# Altium PCB SENSEI_Base-Board.PcbDoc (part 5 of 10)
Units mm, origin at the board's own origin, x right, y up, seen from the top; angles counter-clockwise.
Board outline 51.6 x 28.1 mm, 8 copper layers (Top Sig/Pwr, GND1, Sig1, GND2, Sig2, Pwr, GND3, Bot Sig/Pwr), stack 1.53 mm thick; 209 components, 201 nets, 1031 pads, 2222 vias.
Unrouted connection lines stored in the file: 214.
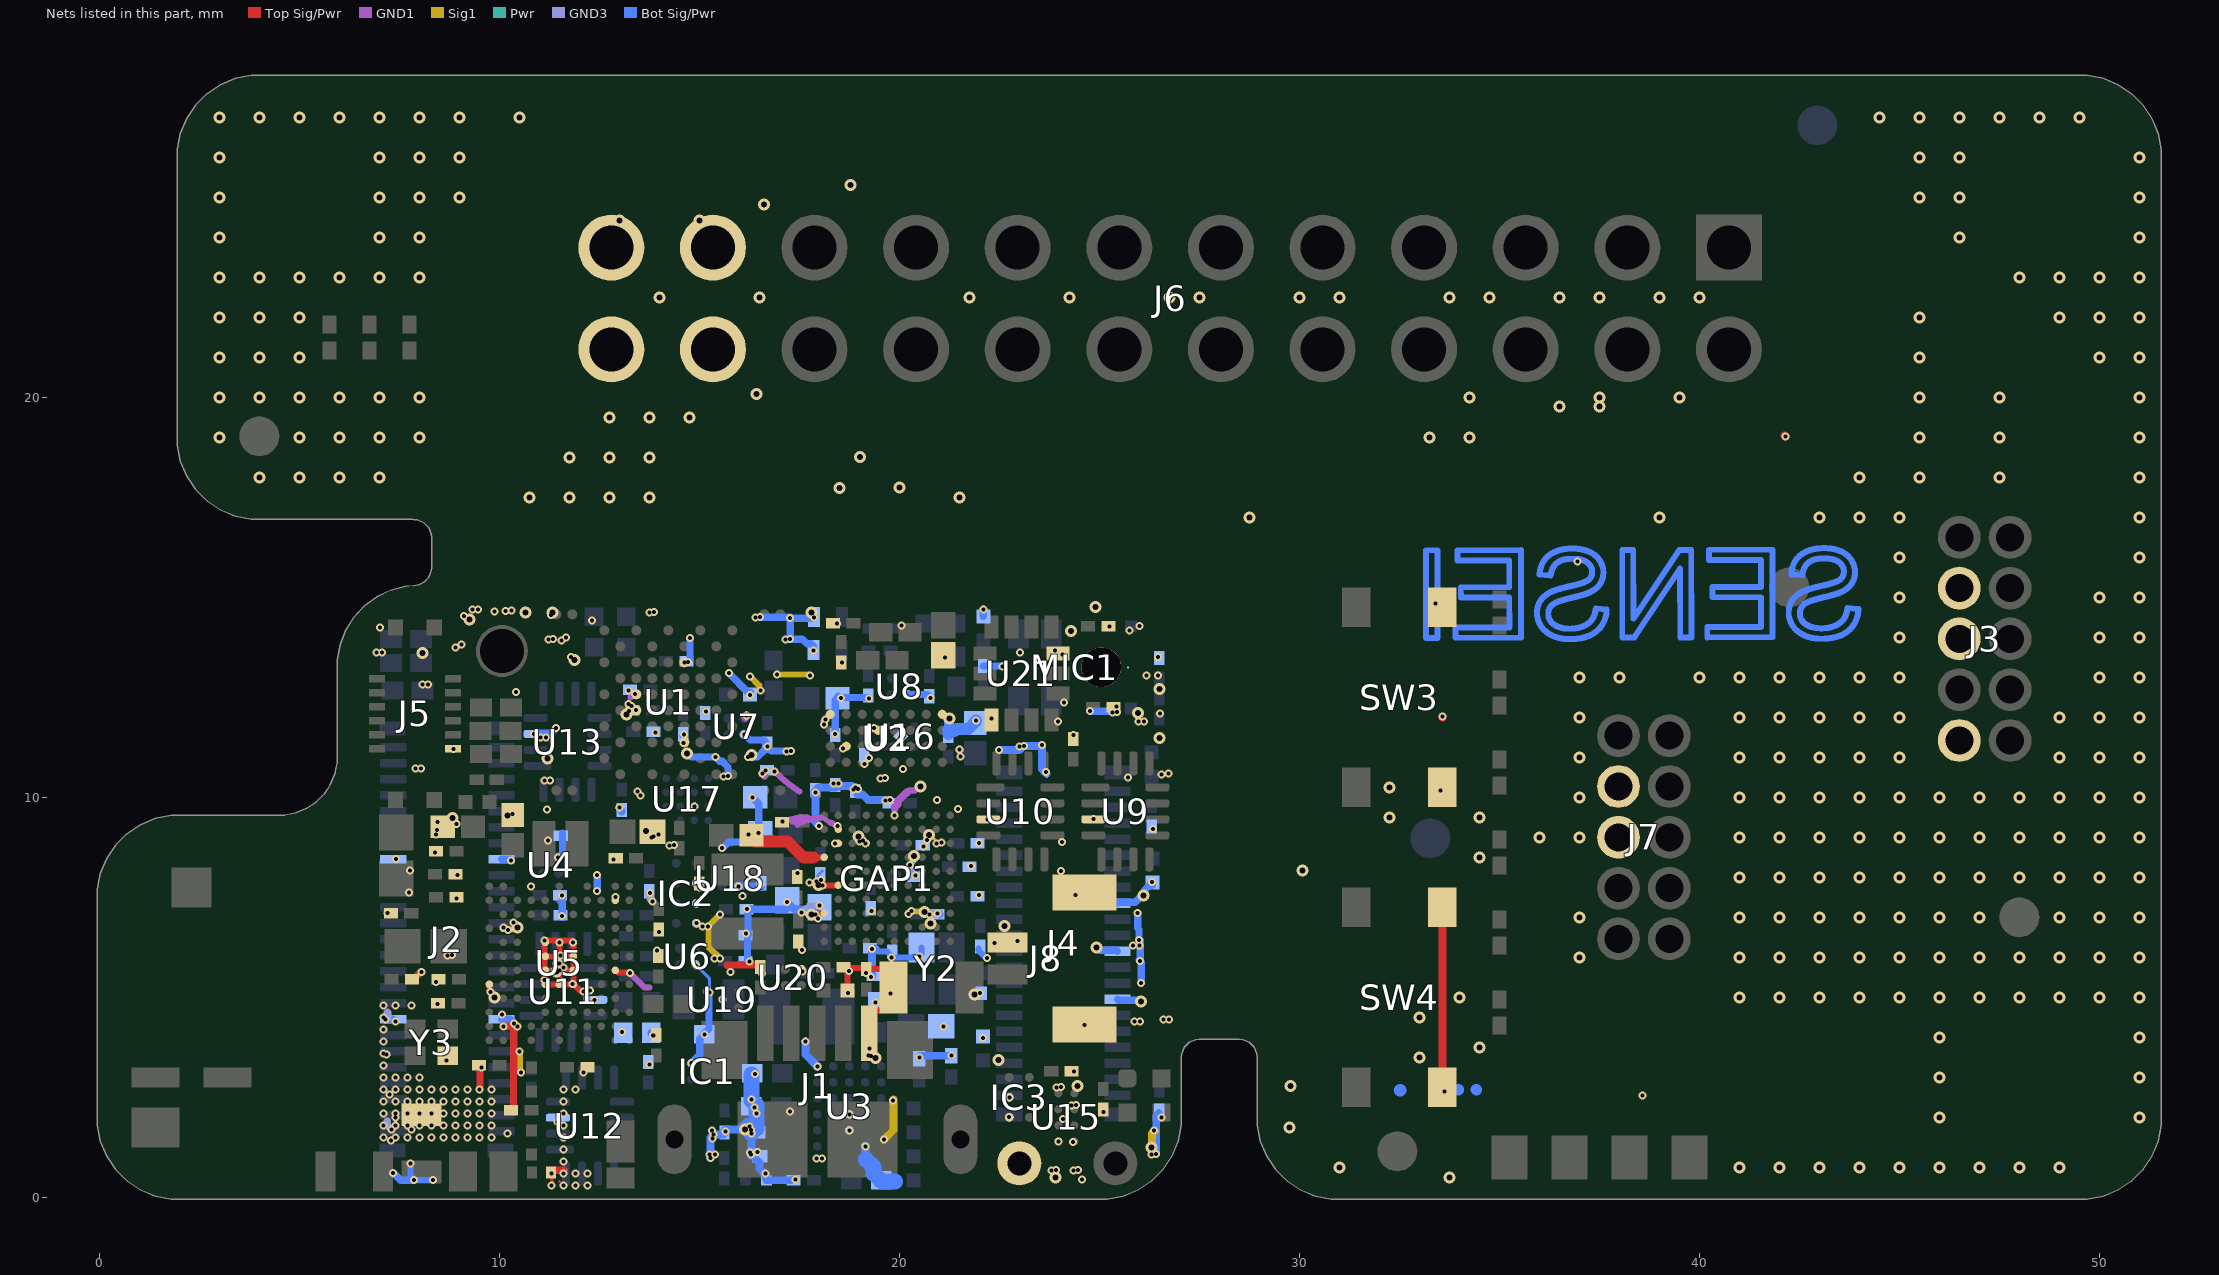
[diagram p10: the nets of this part, all layers, seen from the top]

## Via types
v1: diameter 0.2, hole 0.1, Top Sig/Pwr to GND1, 544 vias
v2: diameter 0.2, hole 0.1, GND3 to Bot Sig/Pwr, 436 vias
v3: diameter 0.2, hole 0.1, GND1 to Sig1, 385 vias
v4: diameter 0.3, hole 0.15, Sig1 to Pwr, 293 vias
v5: diameter 0.3, hole 0.15, Top Sig/Pwr to Bot Sig/Pwr, tented both sides, 284 vias
v6: diameter 0.2, hole 0.1, Pwr to GND3, 280 vias

## Nets (pads, with @x,y where several pads share a name; then routed paths per layer and width w, separated by ;. In a path a pad name is that pad's centre, name@x,y a point inside that pad or via, vN(x,y) a via of type N, cw(c..) or ccw(c..) an arc to the next point about the centre after c; other vN are vias at no path point) (continued)
GND: (continued)
  Bot Sig/Pwr w0.146: 36.285,15.543 36.007,15.563 36.007,15.571 36.008,15.578 36.008,15.585 36.009,15.592 36.009,15.6 36.01,15.607 36.011,15.615 36.012,15.623 36.013,15.631 36.014,15.64 36.015,15.649 36.016,15.658 36.018,15.667 36.02,15.677 36.022,15.688 36.025,15.7 cw(c36.676,15.549) 36.028,15.712 cw(c36.669,15.55) 36.031,15.726 cw(c36.663,15.552) 36.036,15.742 cw(c36.657,15.554) 36.043,15.763 cw(c36.65,15.557) 36.095,15.878 cw(c36.662,15.55) 36.104,15.892 cw(c36.668,15.546) 36.111,15.905 36.114,15.909 cw(c36.606,15.587) 36.124,15.923 cw(c36.601,15.59) 36.138,15.943 cw(c36.598,15.593) 36.199,16.011 cw(c36.605,15.585) 36.212,16.023 cw(c36.609,15.581) 36.223,16.032 cw(c36.613,15.576) 36.232,16.04 cw(c36.617,15.571) 36.241,16.047 36.249,16.054 36.257,16.059 36.264,16.065 36.271,16.07 36.278,16.074 36.284,16.079 36.291,16.083 36.297,16.087 36.303,16.091 36.309,16.094 36.315,16.098 36.321,16.101 36.327,16.104 36.333,16.108 36.338,16.111 36.344,16.113 36.349,16.116 36.355,16.119 36.36,16.122 36.365,16.124 36.371,16.127 36.376,16.129 36.381,16.132 36.387,16.134 36.392,16.137 36.397,16.139 36.4,16.14 36.411,16.145 36.422,16.149 36.432,16.153 36.442,16.157 36.452,16.16 36.461,16.163 36.471,16.166 36.48,16.169 36.488,16.172 36.497,16.175 36.506,16.177 36.514,16.18 36.523,16.182 36.531,16.184 36.539,16.186 36.547,16.188 36.555,16.19 36.563,16.192 36.571,16.193 36.578,16.195 36.586,16.196 36.594,16.198 36.601,16.199 36.609,16.201 36.617,16.202 36.624,16.203 36.631,16.204 36.639,16.206 36.646,16.207 36.654,16.208 36.661,16.209 36.669,16.21 36.676,16.21 36.683,16.211 36.69,16.212 36.697,16.213 36.705,16.213 36.712,16.214 36.719,16.215 36.727,16.215 36.734,16.216 36.741,16.216 36.748,16.217 36.755,16.217 36.762,16.217 36.769,16.218 36.776,16.218 36.783,16.218 36.79,16.219 36.797,16.219 36.805,16.219 36.812,16.219 36.819,16.219 36.826,16.219 36.829,16.219 36.838,16.219 36.846,16.219 36.855,16.219 36.863,16.219 36.871,16.219 36.88,16.218 36.889,16.218 36.897,16.217 36.906,16.217 36.915,16.216 36.924,16.216 36.933,16.215 36.942,16.214 36.951,16.213 36.96,16.212 36.969,16.211 36.979,16.21 36.988,16.209 36.998,16.208 37.008,16.206 37.018,16.205 37.028,16.203 37.039,16.201 37.05,16.199 37.061,16.197 37.072,16.194 37.084,16.192 37.096,16.189 37.109,16.186 37.122,16.182 37.136,16.178 37.151,16.174 cw(c36.875,15.275) 37.166,16.169 cw(c36.878,15.284) 37.184,16.163 cw(c36.881,15.293) 37.203,16.156 cw(c36.884,15.301) 37.226,16.147 37.231,16.145 37.236,16.143 37.241,16.141 37.246,16.139 37.25,16.137 37.255,16.135 37.259,16.133 37.264,16.131 37.269,16.128 37.273,16.126 37.278,16.124 37.283,16.121 37.288,16.119 37.292,16.117 37.297,16.114 37.302,16.111 37.307,16.109 37.312,16.106 37.317,16.103 37.322,16.1 37.327,16.097 37.332,16.094 37.338,16.091 37.343,16.087 37.348,16.084 37.354,16.08 37.359,16.076 37.365,16.072 37.371,16.068 37.377,16.064 37.383,16.059 37.389,16.054 37.396,16.049 37.404,16.043 cw(c37.045,15.617) 37.411,16.036 cw(c37.049,15.621) 37.42,16.029 cw(c37.052,15.626) 37.429,16.02 cw(c37.056,15.63) 37.44,16.009 cw(c37.06,15.633) 37.455,15.993 cw(c37.063,15.636) 37.507,15.927 37.51,15.921 37.513,15.916 37.517,15.91 37.52,15.905 37.524,15.899 37.527,15.893 37.53,15.887 37.534,15.881 37.538,15.874 37.541,15.867 37.545,15.859 37.549,15.851 37.553,15.842 cw(c37.033,15.609) 37.557,15.833 cw(c37.038,15.611) 37.561,15.823 cw(c37.044,15.614) 37.566,15.811 cw(c37.049,15.616) 37.571,15.797 cw(c37.054,15.617) 37.578,15.776 cw(c37.059,15.619) 37.597,15.684 cw(c37.048,15.617) 37.599,15.669 cw(c37.043,15.617) 37.6,15.656 cw(c37.037,15.616) 37.6,15.644 cw(c37.031,15.616) 37.601,15.634 37.601,15.625 37.601,15.617 37.601,15.611 37.601,15.606 37.601,15.6 37.601,15.594 37.601,15.588 37.6,15.582 37.6,15.576 37.599,15.57 37.599,15.563 37.598,15.557 37.597,15.55 37.596,15.542 37.595,15.534 37.594,15.526 cw(c37.09,15.61) 37.592,15.517 cw(c37.096,15.609) 37.59,15.507 cw(c37.101,15.608) 37.588,15.496 cw(c37.105,15.607) 37.585,15.483 cw(c37.11,15.605) 37.58,15.465 cw(c37.115,15.604) 37.548,15.385 cw(c37.106,15.608) 37.542,15.373 cw(c37.102,15.611) 37.536,15.363 cw(c37.097,15.613) 37.531,15.354 cw(c37.093,15.616) 37.526,15.346 37.525,15.344 cw(c37.127,15.594) 37.517,15.333 cw(c37.123,15.597) 37.511,15.323 cw(c37.119,15.6) 37.505,15.315 cw(c37.115,15.603) 37.5,15.308 37.495,15.302 37.49,15.296 37.486,15.291 37.481,15.285 37.477,15.281 37.473,15.276 37.469,15.271 37.465,15.267 37.461,15.263 37.457,15.259 37.453,15.255 37.449,15.251 37.445,15.248 37.441,15.244 37.438,15.241 37.434,15.237 37.43,15.234 37.426,15.231 37.423,15.228 37.419,15.225 37.416,15.222 37.412,15.219 37.408,15.216 37.405,15.213 37.401,15.21 37.398,15.207 37.394,15.205 37.391,15.202 37.387,15.199 37.384,15.197 37.38,15.194 37.377,15.192 37.373,15.189 37.37,15.187 37.366,15.184 37.363,15.182 37.359,15.18 37.355,15.177 37.352,15.175 37.348,15.173 37.344,15.17 37.341,15.168 37.337,15.166 37.334,15.164 37.33,15.162 37.327,15.159 37.323,15.157 37.32,15.155 37.316,15.153 37.312,15.151 37.309,15.149 37.305,15.147 37.301,15.145 37.298,15.143 37.294,15.141 37.291,15.14 ; 36.285,15.544 36.285,15.547 36.286,15.55 36.286,15.554 36.287,15.557 36.287,15.56 36.287,15.563 36.288,15.567 36.288,15.57 36.289,15.574 36.289,15.577 36.29,15.581 36.291,15.584 36.291,15.588 36.292,15.591 36.292,15.595 36.293,15.598 36.294,15.602 36.294,15.605 36.295,15.609 36.296,15.612 36.297,15.616 36.297,15.619 36.298,15.622 36.299,15.626 36.3,15.629 36.301,15.632 36.301,15.636 36.302,15.639 36.303,15.642 36.304,15.646 36.305,15.65 36.306,15.653 36.307,15.657 36.308,15.66 36.31,15.664 36.311,15.667 36.312,15.671 36.313,15.674 36.314,15.678 36.316,15.682 36.317,15.685 36.318,15.689 36.32,15.693 36.321,15.697 36.323,15.701 36.324,15.704 36.326,15.708 36.328,15.712 36.33,15.716 36.332,15.721 36.334,15.725 36.336,15.729 36.338,15.733 36.34,15.738 36.343,15.743 36.345,15.747 36.348,15.752 36.351,15.758 36.355,15.763 36.358,15.769 cw(c36.688,15.557) 36.362,15.775 cw(c36.685,15.56) 36.367,15.782 cw(c36.681,15.562) 36.373,15.79 cw(c36.678,15.564) 36.38,15.8 cw(c36.674,15.568) 36.413,15.836 cw(c36.675,15.567) 36.427,15.849 cw(c36.678,15.564) 36.436,15.857 36.439,15.859 36.444,15.863 36.448,15.867 36.453,15.87 36.457,15.873 36.461,15.875 36.465,15.878 36.468,15.881 36.472,15.883 36.476,15.885 36.479,15.887 36.483,15.889 36.486,15.891 36.489,15.893 36.493,15.895 36.496,15.897 36.499,15.899 36.502,15.9 36.506,15.902 36.509,15.904 36.512,15.905 36.515,15.907 36.518,15.908 36.521,15.91 36.524,15.911 36.527,15.912 36.53,15.914 36.533,15.915 36.536,15.916 36.54,15.918 36.543,15.919 36.546,15.92 36.549,15.921 36.552,15.922 36.555,15.923 36.557,15.924 36.56,15.925 36.563,15.926 36.566,15.927 36.569,15.928 36.572,15.929 36.575,15.93 36.578,15.931 36.581,15.932 36.584,15.933 36.587,15.934 36.59,15.935 36.593,15.936 36.596,15.937 36.599,15.938 36.602,15.938 36.605,15.939 36.608,15.94 36.611,15.941 36.614,15.942 36.617,15.942 36.621,15.943 36.624,15.944 36.627,15.945 36.63,15.945 36.633,15.946 36.635,15.946 36.638,15.947 36.641,15.948 36.644,15.948 36.647,15.949 36.65,15.949 36.653,15.95 36.656,15.95 36.659,15.951 36.662,15.951 36.665,15.952 36.667,15.952 36.67,15.953 36.673,15.953 36.676,15.954 36.679,15.954 36.683,15.955 36.686,15.955 36.689,15.955 36.692,15.956 36.695,15.956 36.698,15.957 36.701,15.957 36.704,15.957 36.707,15.958 36.71,15.958 36.713,15.958 36.717,15.959 36.72,15.959 36.723,15.959 36.726,15.96 36.729,15.96 36.733,15.96 36.736,15.96 36.739,15.961 36.742,15.961 36.746,15.961 36.749,15.961 36.752,15.962 36.756,15.962 36.759,15.962 36.762,15.962 36.766,15.962 36.769,15.963 36.772,15.963 36.776,15.963 36.779,15.963 36.782,15.963 36.786,15.963 36.789,15.963 36.793,15.963 36.796,15.963 36.8,15.963 36.803,15.964 36.807,15.964 36.81,15.964 36.814,15.964 36.818,15.964 36.82,15.964 36.823,15.964 36.827,15.964 36.831,15.964 36.834,15.964 36.838,15.964 36.842,15.963 36.845,15.963 36.849,15.963 36.852,15.963 36.856,15.963 36.859,15.963 36.863,15.963 36.866,15.963 36.87,15.963 36.873,15.963 36.876,15.962 36.879,15.962 36.882,15.962 36.885,15.962 36.888,15.962 36.89,15.962 36.893,15.962 36.896,15.961 36.899,15.961 36.902,15.961 36.905,15.961 36.908,15.961 36.911,15.96 36.913,15.96 36.916,15.96 36.919,15.96 36.922,15.96 36.925,15.959 36.927,15.959 36.93,15.959 36.933,15.959 36.936,15.958 36.938,15.958 36.941,15.958 36.944,15.957 36.947,15.957 36.949,15.957 36.952,15.956 36.955,15.956 36.957,15.956 36.96,15.956 36.963,15.955 36.965,15.955 36.968,15.954 36.971,15.954 36.973,15.954 36.976,15.953 36.978,15.953 36.981,15.953 36.983,15.952 36.986,15.952 36.989,15.951 36.991,15.951 36.994,15.951 36.996,15.95 36.999,15.95 37.001,15.949 37.004,15.949 37.006,15.948 37.009,15.948 37.011,15.947 37.013,15.947 37.016,15.946 37.018,15.946 37.021,15.945 37.023,15.945 37.026,15.944 37.028,15.944 37.03,15.943 37.033,15.943 37.035,15.942 37.037,15.942 37.04,15.941 37.042,15.941 37.044,15.94 37.047,15.939 37.049,15.939 37.051,15.938 37.053,15.938 37.056,15.937 37.058,15.937 37.06,15.936 37.062,15.935 37.065,15.935 37.067,15.934 37.069,15.933 37.071,15.933 37.073,15.932 37.076,15.931 37.078,15.931 37.08,15.93 37.082,15.929 37.084,15.929 37.086,15.928 37.088,15.927 37.09,15.927 37.092,15.926 37.095,15.925 37.097,15.924 37.099,15.923 37.102,15.922 37.104,15.922 37.106,15.921 37.109,15.92 37.111,15.919 37.113,15.918 37.116,15.917 37.118,15.916 37.12,15.915 37.122,15.914 37.125,15.913 37.127,15.912 37.129,15.911 37.131,15.91 37.134,15.909 37.136,15.908 37.138,15.907 37.14,15.906 37.142,15.905 37.144,15.904 37.146,15.903 37.148,15.902 37.15,15.901 37.153,15.9 37.155,15.899 37.157,15.897 37.159,15.896 37.161,15.895 37.164,15.893 37.166,15.892 37.168,15.891 37.17,15.889 37.173,15.888 37.175,15.887 37.177,15.885 37.179,15.884 37.182,15.882 37.184,15.88 37.186,15.879 37.189,15.877 37.191,15.876 37.194,15.874 37.196,15.872 37.198,15.87 37.201,15.868 ; 36.315,15.144 36.311,15.142 36.307,15.14 36.303,15.138 36.3,15.137 36.296,15.135 36.292,15.133 36.288,15.131 36.284,15.129 36.28,15.127 36.276,15.125 36.272,15.123 36.268,15.12 36.264,15.118 36.26,15.116 36.256,15.114 36.252,15.112 36.249,15.11 36.245,15.108 36.241,15.106 36.237,15.103 36.234,15.101 36.23,15.099 36.226,15.097 36.223,15.095 36.219,15.092 36.215,15.09 36.212,15.088 36.208,15.086 36.205,15.083 36.201,15.081 36.198,15.079 36.194,15.076 36.19,15.074 36.187,15.071 36.183,15.069 36.179,15.066 36.176,15.064 36.172,15.061 36.168,15.058 36.165,15.056 36.161,15.053 36.158,15.051 36.155,15.048 36.151,15.045 36.147,15.042 36.144,15.039 36.14,15.036 36.136,15.033 36.133,15.03 36.129,15.027 36.126,15.024 36.122,15.021 36.118,15.018 36.115,15.014 36.111,15.011 36.107,15.007 36.103,15.004 36.1,15 36.096,14.996 36.092,14.992 36.088,14.988 36.084,14.984 36.08,14.98 36.076,14.975 36.072,14.97 36.068,14.965 36.063,14.96 36.059,14.955 36.054,14.949 36.05,14.943 36.045,14.936 ccw(c36.444,14.645) 36.039,14.929 ccw(c36.439,14.648) 36.033,14.92 ccw(c36.479,14.621) 36.027,14.911 ccw(c36.475,14.624) 36.02,14.9 ccw(c36.47,14.627) 36.012,14.886 ccw(c36.463,14.631) 35.982,14.822 ccw(c36.465,14.63) 35.973,14.798 ccw(c36.47,14.628) 35.968,14.783 ccw(c36.475,14.626) 35.964,14.77 ccw(c36.481,14.625) 35.961,14.759 ccw(c36.486,14.623) 35.959,14.749 35.957,14.741 35.955,14.732 35.953,14.724 35.952,14.717 35.951,14.709 35.95,14.702 35.949,14.696 35.948,14.689 35.947,14.683 35.946,14.676 35.946,14.67 35.945,14.664 35.945,14.658 35.944,14.652 35.944,14.647 35.944,14.641 35.943,14.636 35.943,14.63 35.943,14.625 35.943,14.619 35.943,14.614 ccw(c36.621,14.61) 35.943,14.609 35.943,14.604 ccw(c36.547,14.609) 35.943,14.593 ccw(c36.541,14.609) 35.943,14.58 ccw(c36.535,14.609) 35.944,14.566 ccw(c36.529,14.609) 35.946,14.548 ccw(c36.519,14.607) 35.961,14.464 ccw(c36.523,14.608) 35.968,14.439 ccw(c36.528,14.61) 35.973,14.422 ccw(c36.534,14.612) 35.978,14.409 ccw(c36.54,14.614) 35.983,14.397 ccw(c36.545,14.616) 35.987,14.387 35.991,14.377 35.994,14.369 35.998,14.36 36.002,14.353 36.005,14.345 36.009,14.338 36.012,14.332 36.016,14.325 36.02,14.319 36.023,14.313 36.026,14.307 36.03,14.301 36.033,14.296 36.036,14.29 36.04,14.285 36.043,14.279 ccw(c36.552,14.61) 36.095,14.211 ccw(c36.555,14.612) 36.114,14.19 ccw(c36.559,14.616) 36.127,14.177 ccw(c36.564,14.621) 36.138,14.166 ccw(c36.568,14.625) 36.147,14.158 ccw(c36.572,14.63) 36.156,14.15 36.165,14.143 36.173,14.136 36.18,14.13 36.187,14.125 36.194,14.12 36.201,14.115 36.207,14.11 36.214,14.106 36.22,14.101 36.226,14.097 36.232,14.093 36.238,14.089 36.244,14.086 36.25,14.082 36.255,14.079 36.261,14.075 36.267,14.072 36.272,14.069 36.278,14.066 36.283,14.063 36.289,14.06 36.294,14.057 36.299,14.055 36.305,14.052 36.31,14.049 36.315,14.047 36.321,14.044 36.326,14.042 36.331,14.039 ccw(c36.694,14.835) 36.361,14.027 ccw(c36.698,14.843) 36.383,14.018 ccw(c36.701,14.852) 36.402,14.011 ccw(c36.704,14.86) 36.419,14.005 ccw(c36.707,14.869) 36.435,14 36.449,13.995 36.462,13.991 36.475,13.988 36.487,13.985 36.499,13.982 36.51,13.979 36.521,13.977 36.532,13.975 36.542,13.973 36.552,13.971 36.562,13.969 36.572,13.968 36.582,13.966 36.591,13.965 36.6,13.964 36.61,13.962 36.619,13.961 36.628,13.96 36.637,13.959 36.645,13.959 36.654,13.958 36.663,13.957 36.671,13.957 36.68,13.956 36.688,13.956 36.696,13.955 36.704,13.955 36.713,13.955 36.721,13.954 36.729,13.954 36.737,13.954 36.745,13.954 36.754,13.954 36.76,13.954 36.766,13.954 36.773,13.954 36.779,13.954 36.785,13.954 36.792,13.954 36.798,13.955 36.805,13.955 36.811,13.955 36.817,13.955 36.824,13.955 36.83,13.956 36.836,13.956 36.842,13.956 36.849,13.956 36.855,13.957 36.861,13.957 36.867,13.957 36.873,13.958 36.879,13.958 36.885,13.959 36.891,13.959 36.897,13.96 36.903,13.96 36.909,13.961 36.915,13.961 36.921,13.962 36.927,13.962 36.933,13.963 36.939,13.964 36.945,13.964 36.95,13.965 36.956,13.966 36.962,13.966 36.968,13.967 36.973,13.968 36.979,13.969 36.985,13.969 36.99,13.97 36.996,13.971 37.002,13.972 37.007,13.973 37.013,13.974 37.018,13.975 37.024,13.976 37.029,13.976 37.035,13.977 37.04,13.978 37.046,13.979 37.051,13.981 37.056,13.982 37.062,13.983 37.067,13.984 37.072,13.985 37.078,13.986 37.083,13.987 37.088,13.988 37.093,13.99 37.098,13.991 37.104,13.992 37.11,13.994 37.115,13.995 37.121,13.996 37.126,13.998 37.132,13.999 37.137,14.001 37.143,14.003 37.148,14.004 37.153,14.006 37.159,14.007 37.164,14.009 37.169,14.011 37.175,14.012 37.18,14.014 37.185,14.016 37.191,14.018 37.196,14.02 37.202,14.022 37.207,14.024 37.213,14.026 37.218,14.028 37.224,14.03 37.229,14.032 37.234,14.034 37.24,14.036 37.246,14.039 37.252,14.041 37.255,14.043 37.262,14.046 37.269,14.049 37.276,14.052 37.283,14.056 37.29,14.059 37.298,14.063 37.305,14.067 37.313,14.071 37.32,14.075 37.329,14.08 37.337,14.084 37.346,14.09 37.355,14.095 37.364,14.101 37.374,14.108 ccw(c36.979,14.697) 37.385,14.115 ccw(c36.983,14.691) 37.397,14.124 ccw(c36.987,14.685) 37.41,14.134 ccw(c36.992,14.68) 37.426,14.146 ccw(c36.999,14.67) 37.503,14.219 ccw(c36.996,14.674) 37.521,14.241 ccw(c36.99,14.678) 37.534,14.257 ccw(c36.985,14.682) 37.544,14.27 ccw(c36.979,14.687) 37.552,14.282 ccw(c36.973,14.691) 37.56,14.292 37.567,14.303 37.569,14.306 ccw(c36.944,14.71) 37.577,14.319 ccw(c36.95,14.706) 37.586,14.333 ccw(c36.957,14.702) 37.596,14.351 ccw(c36.969,14.696) 37.646,14.465 ccw(c36.963,14.698) 37.654,14.491 ccw(c36.956,14.7) 37.66,14.511 ccw(c36.949,14.702) 37.664,14.527 ccw(c36.941,14.704) 37.668,14.542 ccw(c36.934,14.706) 37.67,14.555 37.673,14.567 37.675,14.579 37.677,14.589 37.678,14.6 37.68,14.61 37.681,14.62 37.682,14.629 37.683,14.638 37.684,14.647 37.684,14.656 37.685,14.664 37.685,14.672 37.686,14.68 37.686,14.688 37.686,14.696 37.413,14.72 ; 36.387,15.173 36.389,15.173 36.39,15.174 36.392,15.174 36.393,15.175 36.395,15.175 36.396,15.176 36.398,15.176 36.399,15.177 36.401,15.177 36.402,15.178 36.404,15.178 36.405,15.179 36.407,15.179 36.408,15.18 36.41,15.18 36.412,15.181 36.413,15.182 36.415,15.182 36.416,15.183 36.418,15.183 36.419,15.184 36.421,15.184 36.423,15.185 36.424,15.185 36.426,15.186 36.428,15.186 36.429,15.187 36.431,15.187 36.433,15.188 36.434,15.188 36.436,15.189 36.438,15.19 36.439,15.19 36.441,15.191 36.443,15.191 36.444,15.192 36.446,15.192 36.448,15.193 36.45,15.193 36.451,15.194 36.453,15.194 36.455,15.195 36.457,15.195 36.458,15.196 36.46,15.197 36.462,15.197 36.464,15.198 36.465,15.198 36.467,15.199 36.469,15.199 36.471,15.2 36.473,15.2 36.474,15.201 36.476,15.202 36.478,15.202 36.48,15.203 36.482,15.203 36.484,15.204 36.486,15.204 36.488,15.205 36.489,15.205 36.491,15.206 36.493,15.207 36.495,15.207 36.497,15.208 36.499,15.208 36.501,15.209 36.503,15.209 36.505,15.21 36.507,15.21 36.509,15.211 36.511,15.212 36.513,15.212 36.515,15.213 36.517,15.213 36.519,15.214 36.521,15.214 36.523,15.215 36.525,15.216 36.528,15.216 36.53,15.217 36.533,15.218 36.535,15.219 36.538,15.219 36.54,15.22 36.543,15.221 36.546,15.221 36.548,15.222 36.551,15.223 36.554,15.224 36.556,15.224 36.559,15.225 36.562,15.226 36.564,15.226 36.567,15.227 36.57,15.228 36.572,15.229 36.575,15.229 36.578,15.23 36.581,15.231 36.583,15.232 36.586,15.232 36.589,15.233 36.592,15.234 36.594,15.235 36.597,15.235 36.6,15.236 36.603,15.237 36.606,15.237 36.609,15.238 36.612,15.239 36.614,15.24 36.617,15.24 36.62,15.241 36.623,15.242 36.626,15.243 36.629,15.243 36.632,15.244 36.635,15.245 36.638,15.246 36.641,15.246 36.644,15.247 36.647,15.248 36.65,15.249 36.653,15.249 36.656,15.25 36.659,15.251 36.662,15.252 36.665,15.253 36.668,15.253 36.671,15.254 36.674,15.255 36.678,15.256 36.681,15.256 36.684,15.257 36.687,15.258 36.69,15.259 36.693,15.259 36.697,15.26 36.7,15.261 36.704,15.262 36.707,15.263 36.711,15.264 36.715,15.265 36.719,15.266 36.723,15.267 36.727,15.268 36.731,15.268 36.735,15.269 36.739,15.27 36.743,15.271 36.747,15.272 36.751,15.273 36.755,15.274 36.759,15.275 36.763,15.276 36.767,15.277 36.771,15.278 36.776,15.279 36.78,15.28 36.784,15.281 36.788,15.282 36.792,15.283 36.797,15.284 36.8,15.285 36.804,15.285 36.808,15.286 36.811,15.287 36.815,15.288 36.818,15.289 36.822,15.29 36.825,15.29 36.829,15.291 36.832,15.292 36.835,15.293 36.839,15.294 36.842,15.294 36.846,15.295 36.849,15.296 36.852,15.297 36.856,15.298 36.859,15.298 36.862,15.299 36.865,15.3 36.869,15.301 36.872,15.302 36.875,15.302 36.878,15.303 36.882,15.304 36.885,15.305 36.888,15.306 36.891,15.306 36.894,15.307 36.897,15.308 36.901,15.309 36.904,15.31 36.907,15.31 36.91,15.311 36.913,15.312 36.916,15.313 36.919,15.313 36.921,15.314 36.923,15.315 36.926,15.315 36.928,15.316 36.931,15.317 36.933,15.317 36.935,15.318 36.938,15.318 36.94,15.319 36.942,15.32 36.945,15.32 36.947,15.321 36.949,15.322 36.952,15.322 36.954,15.323 36.956,15.324 36.959,15.324 36.961,15.325 36.963,15.325 36.966,15.326 36.968,15.327 36.97,15.327 36.972,15.328 36.975,15.329 36.977,15.329 36.979,15.33 36.981,15.331 36.983,15.331 36.986,15.332 36.988,15.332 36.99,15.333 36.992,15.334 36.994,15.334 36.996,15.335 36.999,15.336 37.001,15.336 37.003,15.337 37.005,15.338 37.007,15.338 37.009,15.339 37.011,15.339 37.013,15.34 37.015,15.341 37.017,15.341 37.019,15.342 37.022,15.343 37.024,15.343 37.026,15.344 37.028,15.344 37.03,15.345 37.032,15.346 37.034,15.346 37.036,15.347 37.038,15.348 37.04,15.348 37.041,15.349 37.043,15.35 37.045,15.35 37.047,15.351 37.049,15.351 37.051,15.352 37.053,15.353 37.055,15.353 37.057,15.354 37.059,15.355 37.061,15.355 37.062,15.356 37.064,15.356 37.066,15.357 37.068,15.358 37.07,15.358 37.072,15.359 37.073,15.36 37.075,15.36 37.077,15.361 37.079,15.361 37.081,15.362 37.082,15.363 37.084,15.363 37.086,15.364 37.088,15.365 37.089,15.365 37.09,15.366 37.092,15.366 37.093,15.366 37.094,15.367 37.095,15.367 37.097,15.368 37.098,15.368 37.099,15.369 37.1,15.369 37.102,15.37 37.103,15.37 37.104,15.371 37.105,15.371 37.107,15.372 37.108,15.372 37.109,15.373 37.11,15.373 ; 36.479,14.895 36.476,14.894 36.474,14.893 36.472,14.892 36.47,14.891 36.468,14.89 36.465,14.89 36.463,14.889 36.461,14.888 36.459,14.887 36.457,14.886 36.455,14.885 36.453,14.884 36.451,14.884 36.449,14.883 36.447,14.882 36.445,14.881 36.443,14.88 36.441,14.879 36.438,14.878 36.436,14.877 36.434,14.876 36.433,14.875 36.431,14.875 36.429,14.874 36.427,14.873 36.425,14.872 36.423,14.871 36.421,14.87 36.419,14.869 36.417,14.868 36.415,14.867 36.413,14.866 36.411,14.865 36.409,14.864 36.408,14.863 36.406,14.862 36.404,14.861 36.402,14.86 36.4,14.86 36.399,14.859 36.397,14.858 36.395,14.857 36.393,14.856 36.391,14.855 36.39,14.854 36.388,14.853 36.386,14.852 36.384,14.851 36.383,14.85 36.381,14.849 36.379,14.848 36.378,14.847 36.376,14.846 36.374,14.845 36.373,14.844 36.371,14.843 36.369,14.842 36.368,14.841 36.366,14.84 36.365,14.839 36.363,14.838 36.361,14.837 36.36,14.836 36.358,14.834 36.357,14.833 36.355,14.832 36.354,14.831 36.352,14.83 36.351,14.829 36.349,14.828 36.348,14.827 36.346,14.826 36.345,14.825 36.343,14.824 36.342,14.823 36.34,14.822 36.339,14.821 36.337,14.82 36.336,14.819 36.335,14.817 36.333,14.816 36.332,14.815 36.33,14.814 36.328,14.813 36.327,14.811 36.325,14.81 36.324,14.809 36.322,14.808 36.321,14.806 36.32,14.805 36.318,14.804 36.317,14.803 36.315,14.801 36.314,14.8 36.312,14.799 36.311,14.797 36.31,14.796 36.308,14.795 36.307,14.794 36.306,14.792 36.304,14.791 36.303,14.789 36.301,14.788 36.3,14.786 36.299,14.785 36.297,14.783 36.296,14.782 36.294,14.78 36.293,14.779 36.292,14.777 36.29,14.776 36.289,14.774 36.287,14.772 36.286,14.771 36.285,14.769 36.283,14.767 36.282,14.765 36.279,14.762 36.277,14.758 36.274,14.755 36.271,14.751 ccw(c36.508,14.589) 36.268,14.746 ccw(c36.506,14.591) 36.265,14.741 ccw(c36.503,14.592) 36.261,14.735 ccw(c36.501,14.594) 36.257,14.727 ccw(c36.498,14.595) 36.25,14.714 ccw(c36.497,14.596) 36.237,14.682 ccw(c36.501,14.595) 36.235,14.674 ccw(c36.504,14.594) 36.233,14.667 ccw(c36.507,14.593) 36.231,14.661 ccw(c36.509,14.592) 36.23,14.656 36.229,14.651 36.228,14.647 36.227,14.642 36.226,14.638 36.226,14.634 36.225,14.63 36.225,14.627 36.224,14.623 36.224,14.62 36.224,14.616 36.223,14.613 36.223,14.61 36.223,14.606 36.223,14.603 36.223,14.6 36.222,14.597 36.222,14.594 36.222,14.591 36.222,14.589 36.222,14.586 36.222,14.58 36.222,14.575 36.223,14.57 36.223,14.565 ccw(c36.54,14.585) 36.223,14.559 ccw(c36.537,14.585) 36.224,14.552 ccw(c36.534,14.585) 36.225,14.545 ccw(c36.531,14.584) 36.226,14.535 ccw(c36.527,14.584) 36.229,14.518 ccw(c36.526,14.583) 36.24,14.482 ccw(c36.531,14.585) 36.243,14.473 ccw(c36.534,14.586) 36.246,14.466 ccw(c36.537,14.587) 36.249,14.46 ccw(c36.539,14.589) 36.251,14.454 ccw(c36.542,14.59) 36.254,14.449 36.256,14.444 36.258,14.44 36.26,14.436 36.263,14.432 36.265,14.428 36.267,14.425 36.269,14.421 36.271,14.418 36.273,14.415 36.275,14.412 36.277,14.409 36.279,14.406 36.281,14.403 36.283,14.4 36.285,14.398 ccw(c36.531,14.576) 36.289,14.391 ccw(c36.534,14.578) 36.294,14.386 ccw(c36.536,14.58) 36.298,14.381 ccw(c36.538,14.582) 36.301,14.377 36.305,14.373 36.308,14.369 36.311,14.366 36.314,14.363 36.317,14.36 36.32,14.357 36.323,14.354 36.325,14.352 36.328,14.349 36.331,14.347 36.333,14.344 36.336,14.342 36.339,14.34 36.341,14.338 36.344,14.336 36.346,14.334 36.349,14.332 36.351,14.33 36.354,14.328 36.356,14.326 36.359,14.324 36.361,14.322 36.363,14.321 36.366,14.319 36.368,14.317 36.371,14.316 36.373,14.314 36.375,14.312 36.378,14.311 36.38,14.309 36.383,14.308 36.385,14.306 36.388,14.305 36.39,14.303 36.393,14.302 36.395,14.3 36.397,14.299 36.399,14.298 36.402,14.296 36.404,14.295 36.407,14.294 36.409,14.292 36.411,14.291 36.414,14.29 36.416,14.289 36.419,14.287 36.421,14.286 36.424,14.285 36.426,14.284 36.429,14.282 36.431,14.281 36.434,14.28 36.436,14.279 36.439,14.278 36.441,14.277 36.443,14.275 36.446,14.274 36.448,14.273 36.451,14.272 36.453,14.271 36.456,14.27 36.458,14.269 36.46,14.268 36.463,14.267 36.465,14.266 36.468,14.265 36.47,14.264 36.473,14.263 36.48,14.26 36.487,14.258 36.493,14.256 36.499,14.254 36.505,14.252 36.51,14.25 36.516,14.248 36.522,14.246 36.527,14.245 36.533,14.243 36.538,14.242 36.544,14.24 36.549,14.239 36.554,14.238 36.559,14.236 36.565,14.235 36.57,14.234 36.575,14.233 36.58,14.232 36.585,14.231 36.59,14.23 36.595,14.229 36.6,14.228 36.605,14.227 36.61,14.226 36.615,14.225 36.62,14.224 36.625,14.224 36.63,14.223 36.635,14.222 36.64,14.222 36.645,14.221 36.65,14.22 36.654,14.22 36.659,14.219 36.664,14.219 36.669,14.218 36.674,14.218 36.679,14.217 36.684,14.217 36.689,14.217 36.694,14.216 36.698,14.216 36.703,14.216 36.708,14.215 36.713,14.215 36.717,14.215 36.722,14.215 36.727,14.215 36.732,14.214 36.737,14.214 36.742,14.214 36.747,14.214 36.751,14.214 36.756,14.214 36.761,14.214 36.766,14.214 36.773,14.214 36.78,14.214 36.786,14.214 36.793,14.214 36.799,14.214 36.806,14.215 36.812,14.215 36.819,14.215 36.825,14.216 36.832,14.216 36.839,14.217 36.846,14.217 36.852,14.218 36.859,14.218 36.866,14.219 36.873,14.22 36.88,14.221 36.887,14.221 36.895,14.222 36.902,14.223 36.909,14.224 36.917,14.226 36.924,14.227 36.932,14.228 36.94,14.23 36.948,14.231 36.956,14.233 36.964,14.235 36.973,14.237 36.982,14.239 36.991,14.241 37,14.243 37.01,14.246 37.02,14.249 37.031,14.252 37.042,14.256 37.054,14.26 ccw(c36.81,14.951) 37.068,14.265 ccw(c36.813,14.944) 37.082,14.271 ccw(c36.816,14.937) 37.099,14.278 37.103,14.279 37.106,14.281 37.109,14.282 37.112,14.284 37.115,14.285 37.118,14.286 37.121,14.288 37.124,14.289 37.126,14.29 37.129,14.292 37.132,14.293 37.135,14.294 37.138,14.296 37.14,14.297 37.143,14.299 37.146,14.3 37.149,14.302 37.152,14.303 37.155,14.305 37.158,14.307 37.161,14.308 37.164,14.31 37.167,14.311 37.17,14.313 37.173,14.315 37.176,14.316 37.178,14.318 37.181,14.32 37.184,14.321 37.187,14.323 37.189,14.325 37.192,14.327 37.195,14.328 37.198,14.33 37.201,14.332 37.203,14.334 37.206,14.336 37.209,14.338 37.212,14.34 37.215,14.342 37.218,14.344 37.22,14.346 37.223,14.348 37.226,14.35 37.229,14.352 37.232,14.354 37.234,14.356 37.237,14.359 37.24,14.361 37.243,14.363 37.246,14.365 37.249,14.368 37.252,14.37 37.254,14.373 37.257,14.375 37.26,14.378 37.263,14.381 37.266,14.384 37.269,14.387 37.272,14.39 37.276,14.393 37.279,14.396 37.282,14.399 37.285,14.403 37.289,14.406 37.292,14.41 37.296,14.414 37.299,14.419 37.303,14.423 37.307,14.428 ccw(c37.008,14.662) 37.311,14.434 ccw(c37.012,14.659) 37.316,14.44 ccw(c37.015,14.657) 37.321,14.447 37.323,14.45 37.326,14.455 37.329,14.459 37.331,14.463 37.334,14.468 37.336,14.472 37.339,14.476 37.341,14.479 37.343,14.483 37.345,14.487 37.347,14.491 37.349,14.495 37.351,14.498 37.353,14.502 37.355,14.506 37.356,14.509 37.358,14.513 37.36,14.516 37.361,14.52 37.363,14.523 37.364,14.527 37.366,14.53 37.367,14.534 37.369,14.537 37.37,14.541 37.371,14.544 37.373,14.548 37.374,14.551 37.375,14.554 37.376,14.558 37.378,14.561 37.379,14.565 37.38,14.568 37.381,14.572 37.382,14.575 37.383,14.578 37.384,14.581 37.385,14.585 37.386,14.588 37.387,14.591 37.388,14.595 37.389,14.598 37.39,14.602 37.391,14.605 37.392,14.608 37.393,14.612 37.394,14.615 37.395,14.619 37.396,14.622 37.396,14.626 37.397,14.629 37.398,14.633 37.399,14.636 37.4,14.64 37.4,14.643 37.401,14.646 37.402,14.65 37.402,14.653 37.403,14.656 37.404,14.66 37.404,14.663 37.405,14.666 37.406,14.67 37.406,14.673 37.407,14.677 37.407,14.68 37.408,14.684 37.408,14.687 37.409,14.691 37.409,14.694 37.41,14.698 37.41,14.701 37.411,14.705 37.411,14.708 37.412,14.712 37.412,14.715 37.413,14.719 ; 36.609,14.936 36.61,14.936 36.612,14.937 36.613,14.937 36.615,14.937 36.616,14.938 36.618,14.938 36.619,14.939 36.621,14.939 36.623,14.94 36.624,14.94 36.626,14.94 36.627,14.941 36.629,14.941 36.63,14.942 36.632,14.942 36.634,14.943 36.635,14.943 36.637,14.943 36.639,14.944 36.64,14.944 36.642,14.945 36.644,14.945 36.645,14.946 36.647,14.946 36.649,14.947 36.65,14.947 36.652,14.948 36.654,14.948 36.655,14.948 36.657,14.949 36.659,14.949 36.66,14.95 36.662,14.95 36.664,14.951 36.666,14.951 36.667,14.952 36.669,14.952 36.671,14.953 36.673,14.953 36.674,14.954 36.676,14.954 36.678,14.954 36.68,14.955 36.682,14.955 36.683,14.956 36.685,14.956 36.687,14.957 36.689,14.957 36.691,14.958 36.693,14.958 36.695,14.959 36.696,14.959 36.698,14.96 36.7,14.96 36.702,14.961 36.704,14.961 36.706,14.962 36.708,14.962 36.71,14.963 36.711,14.963 36.713,14.964 36.715,14.964 36.717,14.965 36.719,14.965 36.721,14.966 36.723,14.966 36.725,14.967 36.727,14.967 36.729,14.968 36.731,14.968 36.733,14.969 36.735,14.969 36.737,14.97 36.739,14.97 36.741,14.971 36.743,14.971 36.746,14.972 36.748,14.973 36.751,14.973 36.753,14.974 36.756,14.974 36.758,14.975 36.761,14.976 36.764,14.976 36.766,14.977 36.769,14.978 36.772,14.978 36.774,14.979 36.777,14.98 36.78,14.98 36.782,14.981 36.785,14.982 36.788,14.982 36.79,14.983 36.793,14.984 36.796,14.984 36.799,14.985 36.801,14.986 36.804,14.987 36.807,14.987 36.81,14.988 36.813,14.989 36.815,14.989 36.818,14.99 36.821,14.991 36.824,14.991 36.827,14.992 36.83,14.993 36.832,14.993 36.835,14.994 36.838,14.995 36.841,14.996 36.844,14.996 36.847,14.997 36.85,14.998 36.853,14.998 36.856,14.999 36.859,15 36.862,15.001 36.865,15.001 36.869,15.002 36.87,15.003 36.874,15.004 36.878,15.004 36.881,15.005 36.885,15.006 36.888,15.007 36.892,15.008 36.895,15.009 36.899,15.01 36.902,15.011 36.906,15.011 36.909,15.012 36.913,15.013 36.916,15.014 36.92,15.015 36.923,15.016 36.926,15.017 36.93,15.017 36.933,15.018 36.937,15.019 36.94,15.02 36.943,15.021 36.947,15.022 36.95,15.023 36.953,15.023 36.957,15.024 36.96,15.025 36.963,15.026 36.966,15.027 36.97,15.028 36.973,15.029 36.976,15.03 36.979,15.03 36.982,15.031 36.986,15.032 36.989,15.033 36.992,15.034 36.995,15.035 36.998,15.035 37.001,15.036 37.004,15.037 37.008,15.038 37.011,15.039 37.014,15.04 37.017,15.041 37.019,15.041 37.022,15.042 37.024,15.043 37.027,15.043 37.029,15.044 37.032,15.045 37.034,15.046 37.037,15.046 37.039,15.047 37.042,15.048 37.044,15.048 37.046,15.049 37.049,15.05 37.051,15.05 37.054,15.051 37.056,15.052 37.059,15.053 37.061,15.053 37.063,15.054 37.066,15.055 37.068,15.055 37.07,15.056 37.073,15.057 37.075,15.057 37.077,15.058 37.08,15.059 37.082,15.06 37.084,15.06 37.086,15.061 37.089,15.062 37.091,15.062 37.093,15.063 37.095,15.064 37.098,15.064 37.1,15.065 37.102,15.066 37.104,15.066 37.107,15.067 37.109,15.068 37.111,15.069 37.113,15.069 37.115,15.07 37.117,15.071 37.119,15.071 37.122,15.072 37.124,15.073 37.126,15.073 37.128,15.074 37.13,15.075 37.132,15.075 37.134,15.076 37.136,15.077 37.138,15.077 37.14,15.078 37.142,15.079 37.144,15.079 37.147,15.08 37.149,15.081 37.151,15.082 37.153,15.082 37.155,15.083 37.156,15.084 37.158,15.084 37.16,15.085 37.162,15.085 37.164,15.086 37.165,15.087 37.167,15.087 37.168,15.088 37.17,15.088 37.171,15.089 37.173,15.089 37.174,15.09 37.176,15.09 37.177,15.091 37.179,15.091 37.18,15.092 37.182,15.093 37.183,15.093 37.185,15.094 37.186,15.094 37.188,15.095 37.189,15.095 37.191,15.096 37.192,15.096 37.193,15.097 37.195,15.097 37.196,15.098 37.198,15.098 37.199,15.099 37.201,15.1 37.202,15.1 37.203,15.101 37.205,15.101 37.206,15.102 37.208,15.102 37.209,15.103 37.21,15.103 37.212,15.104 37.213,15.104 37.214,15.105 37.216,15.105 37.217,15.106 37.218,15.106 37.22,15.107 37.221,15.108 37.222,15.108 37.224,15.109 37.225,15.109 37.226,15.11 37.228,15.11 37.229,15.111 37.23,15.111 37.231,15.112 37.233,15.112 37.234,15.113 37.235,15.113 37.236,15.114 37.238,15.114 37.239,15.115 37.24,15.115 37.241,15.116 37.243,15.117 37.244,15.117 37.245,15.118 37.246,15.118 37.248,15.119 ; 37.12,15.377 37.119,15.376 37.118,15.376 37.116,15.375 37.115,15.375 37.114,15.374 37.113,15.374 37.112,15.374 ; 37.202,15.867 37.204,15.866 37.206,15.864 37.208,15.863 37.209,15.861 37.211,15.86 37.213,15.858 37.215,15.856 37.217,15.855 37.218,15.853 37.22,15.852 37.222,15.85 37.224,15.848 37.226,15.846 37.228,15.845 37.23,15.843 37.232,15.841 37.234,15.839 37.235,15.837 37.237,15.835 37.239,15.834 37.241,15.832 37.243,15.83 37.244,15.828 37.246,15.826 37.248,15.824 37.25,15.822 37.252,15.82 37.254,15.817 37.255,15.815 37.257,15.813 37.259,15.811 37.261,15.808 37.263,15.806 37.265,15.803 37.267,15.801 37.269,15.798 37.271,15.795 37.273,15.793 37.275,15.79 37.277,15.787 37.279,15.783 37.281,15.78 37.283,15.776 37.286,15.772 cw(c37.044,15.633) 37.288,15.768 cw(c37.047,15.634) 37.291,15.763 cw(c37.049,15.636) 37.293,15.758 cw(c37.052,15.637) 37.296,15.752 cw(c37.054,15.638) 37.3,15.744 cw(c37.057,15.64) 37.31,15.717 cw(c37.057,15.639) 37.314,15.701 cw(c37.054,15.639) 37.316,15.692 cw(c37.051,15.638) 37.317,15.685 cw(c37.048,15.638) 37.318,15.679 cw(c37.046,15.637) 37.319,15.674 37.32,15.67 37.32,15.665 37.321,15.661 37.321,15.657 37.321,15.653 37.321,15.649 37.322,15.646 37.322,15.642 37.322,15.639 37.322,15.636 37.322,15.633 37.322,15.631 37.322,15.629 37.322,15.626 37.322,15.624 37.321,15.621 37.321,15.619 37.321,15.616 37.321,15.614 37.321,15.611 37.321,15.609 37.32,15.606 37.32,15.603 37.32,15.601 37.319,15.598 37.319,15.595 37.319,15.592 37.318,15.589 37.318,15.586 37.317,15.583 37.317,15.579 37.316,15.576 37.315,15.572 37.314,15.568 37.313,15.564 37.312,15.56 cw(c37.073,15.626) 37.311,15.556 cw(c37.076,15.626) 37.309,15.551 cw(c37.078,15.625) 37.307,15.545 cw(c37.08,15.624) 37.304,15.537 cw(c37.083,15.623) 37.295,15.516 cw(c37.083,15.623) 37.287,15.502 cw(c37.081,15.625) 37.283,15.495 cw(c37.079,15.626) 37.279,15.489 cw(c37.077,15.627) 37.276,15.485 cw(c37.075,15.629) 37.273,15.481 37.271,15.478 37.268,15.475 37.266,15.472 37.263,15.469 37.261,15.466 37.259,15.464 37.257,15.461 37.255,15.459 37.253,15.457 37.251,15.454 37.249,15.452 37.247,15.45 37.245,15.449 37.243,15.447 37.241,15.445 37.239,15.443 37.237,15.441 ; 37.257,15.123 37.256,15.122 37.255,15.122 37.253,15.121 37.252,15.121 37.251,15.12 37.25,15.12 37.249,15.119 ; 42.514,14.595 42.514,14.59 42.514,14.585 42.514,14.58 42.515,14.575 ccw(c42.832,14.595) 42.515,14.569 ccw(c42.829,14.595) 42.516,14.562 ccw(c42.826,14.594) 42.517,14.554 ccw(c42.822,14.594) 42.518,14.544 ccw(c42.819,14.593) 42.521,14.528 ccw(c42.818,14.593) 42.531,14.492 ccw(c42.822,14.595) 42.535,14.483 ccw(c42.825,14.596) 42.538,14.476 ccw(c42.828,14.597) 42.54,14.469 ccw(c42.831,14.598) 42.543,14.464 ccw(c42.834,14.6) 42.545,14.459 42.548,14.454 42.55,14.45 42.552,14.446 42.554,14.442 42.556,14.438 42.558,14.434 42.56,14.431 42.563,14.428 42.565,14.425 42.567,14.421 42.569,14.419 42.57,14.416 42.572,14.413 42.574,14.41 42.576,14.407 ccw(c42.823,14.586) 42.581,14.401 ccw(c42.825,14.588) 42.585,14.395 ccw(c42.828,14.59) 42.589,14.391 ccw(c42.83,14.592) 42.593,14.386 42.596,14.383 42.599,14.379 42.603,14.376 42.606,14.373 42.609,14.37 42.611,14.367 42.614,14.364 42.617,14.361 42.62,14.359 42.622,14.356 42.625,14.354 42.628,14.352 42.63,14.35 42.633,14.348 42.635,14.345 42.638,14.343 42.64,14.341 42.643,14.339 42.645,14.338 42.648,14.336 42.65,14.334 42.653,14.332 42.655,14.33 42.658,14.329 42.66,14.327 42.662,14.325 42.665,14.324 42.667,14.322 42.67,14.321 42.672,14.319 42.674,14.318 42.677,14.316 42.679,14.315 42.682,14.313 42.684,14.312 42.687,14.31 42.689,14.309 42.691,14.307 42.694,14.306 42.696,14.305 42.698,14.304 42.701,14.302 42.703,14.301 42.705,14.3 42.708,14.298 42.71,14.297 42.713,14.296 42.715,14.295 42.718,14.293 42.72,14.292 42.723,14.291 42.725,14.29 42.728,14.288 42.73,14.287 42.733,14.286 42.735,14.285 42.738,14.284 42.74,14.283 42.742,14.282 42.745,14.281 42.747,14.28 42.75,14.279 42.752,14.278 42.755,14.277 42.757,14.276 42.76,14.275 42.762,14.274 42.765,14.273 42.772,14.27 42.778,14.268 42.784,14.266 42.79,14.263 42.796,14.262 42.802,14.26 42.808,14.258 42.813,14.256 42.819,14.255 42.824,14.253 42.83,14.252 42.835,14.25 42.84,14.249 42.846,14.247 42.851,14.246 42.856,14.245 42.861,14.244 42.866,14.243 42.872,14.241 42.877,14.24 42.882,14.239 42.887,14.238 42.892,14.238 42.897,14.237 42.902,14.236 42.907,14.235 42.912,14.234 42.917,14.233 42.922,14.233 42.927,14.232 42.932,14.231 42.936,14.231 42.941,14.23 42.946,14.23 42.951,14.229 42.956,14.229 42.961,14.228 42.966,14.228 42.971,14.227 42.976,14.227 42.981,14.226 42.985,14.226 42.99,14.226 42.995,14.225 43,14.225 43.004,14.225 43.009,14.225 43.014,14.225 43.019,14.224 43.024,14.224 43.028,14.224 43.033,14.224 43.038,14.224 43.043,14.224 43.048,14.224 43.053,14.224 43.058,14.224 43.065,14.224 43.071,14.224 43.078,14.224 43.084,14.224 43.091,14.224 43.098,14.224 43.104,14.225 43.111,14.225 43.117,14.225 43.124,14.226 43.13,14.226 43.137,14.227 43.144,14.227 43.151,14.228 43.158,14.229 43.165,14.229 43.172,14.23 43.179,14.231 43.186,14.232 43.193,14.233 43.201,14.234 43.208,14.235 43.216,14.237 43.224,14.238 43.231,14.239 43.239,14.241 43.247,14.243 43.256,14.244 43.264,14.246 43.273,14.248 43.282,14.251 43.292,14.253 43.301,14.256 43.312,14.259 43.322,14.262 43.334,14.266 43.346,14.27 ccw(c43.102,14.96) 43.359,14.275 ccw(c43.105,14.953) 43.374,14.281 ccw(c43.107,14.947) 43.391,14.288 43.394,14.289 43.398,14.291 43.401,14.292 43.404,14.293 43.407,14.295 43.409,14.296 43.412,14.297 43.415,14.299 43.418,14.3 43.421,14.301 43.424,14.303 43.427,14.304 43.429,14.306 43.432,14.307 43.435,14.308 43.438,14.31 43.441,14.312 43.444,14.313 43.447,14.315 43.45,14.316 43.453,14.318 43.456,14.32 43.459,14.321 43.462,14.323 43.464,14.324 43.467,14.326 43.47,14.328 43.473,14.329 43.476,14.331 43.478,14.333 43.481,14.335 43.484,14.336 43.487,14.338 43.489,14.34 43.492,14.342 43.495,14.344 43.498,14.346 43.501,14.347 43.504,14.349 43.506,14.351 43.509,14.353 43.512,14.355 43.515,14.357 43.517,14.359 43.52,14.362 43.523,14.364 43.526,14.366 43.529,14.368 43.532,14.37 43.534,14.373 43.537,14.375 43.54,14.378 43.543,14.38 43.546,14.383 43.549,14.385 43.552,14.388 43.555,14.391 43.558,14.393 43.561,14.396 43.564,14.399 43.567,14.402 43.57,14.406 43.574,14.409 43.577,14.413 43.58,14.416 43.584,14.42 43.587,14.424 43.591,14.429 43.595,14.433 43.599,14.438 ccw(c43.3,14.671) 43.603,14.444 ccw(c43.303,14.669) 43.608,14.45 ccw(c43.306,14.667) 43.613,14.457 43.615,14.46 43.618,14.465 43.62,14.469 43.623,14.473 43.626,14.477 43.628,14.481 43.63,14.485 43.633,14.489 43.635,14.493 43.637,14.497 43.639,14.501 43.641,14.504 43.643,14.508 43.644,14.512 43.646,14.515 43.648,14.519 43.65,14.523 43.651,14.526 43.653,14.53 43.654,14.533 43.656,14.537 43.657,14.54 43.659,14.544 43.66,14.547 43.662,14.551 43.663,14.554 43.664,14.557 43.666,14.561 43.667,14.564 43.668,14.567 43.669,14.571 43.671,14.574 43.672,14.578 43.673,14.581 43.674,14.585 43.675,14.588 43.676,14.591 43.677,14.595 43.678,14.598 43.679,14.601 43.68,14.605 43.681,14.608 43.682,14.611 43.683,14.615 43.684,14.618 43.685,14.622 43.686,14.625 43.686,14.628 43.687,14.632 43.688,14.635 43.689,14.639 43.69,14.643 43.691,14.646 43.691,14.649 43.692,14.653 43.693,14.656 43.693,14.659 43.694,14.663 43.695,14.666 43.695,14.669 43.696,14.673 43.697,14.676 43.697,14.68 43.698,14.683 43.698,14.686 43.699,14.69 43.7,14.693 43.7,14.697 43.701,14.7 43.701,14.704 43.702,14.707 43.702,14.711 43.703,14.714 43.703,14.718 43.704,14.722 43.704,14.725 43.704,14.729 ; 42.514,14.595 42.514,14.598 42.514,14.601 42.514,14.604 42.514,14.607 42.514,14.61 42.514,14.613 42.515,14.616 42.515,14.619 42.515,14.623 42.515,14.626 42.516,14.629 42.516,14.633 42.516,14.636 42.517,14.64 42.517,14.644 42.518,14.648 42.519,14.652 42.52,14.656 42.52,14.661 42.522,14.666 cw(c42.801,14.602) 42.523,14.671 cw(c42.798,14.603) 42.524,14.677 cw(c42.796,14.603) 42.526,14.684 cw(c42.793,14.604) 42.529,14.692 cw(c42.789,14.606) 42.542,14.724 cw(c42.79,14.605) 42.548,14.737 cw(c42.792,14.604) 42.553,14.745 cw(c42.795,14.602) 42.556,14.751 cw(c42.797,14.601) 42.56,14.756 cw(c42.8,14.599) 42.563,14.76 42.566,14.764 42.568,14.768 42.571,14.772 42.573,14.775 42.575,14.777 42.576,14.779 42.578,14.78 42.579,14.782 42.58,14.784 42.582,14.785 42.583,14.787 42.585,14.789 42.586,14.79 42.587,14.792 42.589,14.793 42.59,14.795 42.592,14.796 42.593,14.798 42.594,14.799 42.596,14.8 42.597,14.802 42.599,14.803 42.6,14.805 42.601,14.806 42.603,14.807 42.604,14.808 42.606,14.81 42.607,14.811 42.608,14.812 42.61,14.814 42.611,14.815 42.613,14.816 42.614,14.817 42.616,14.819 42.617,14.82 42.619,14.821 42.62,14.822 42.622,14.824 42.623,14.825 42.625,14.826 42.626,14.827 42.628,14.828 42.629,14.829 42.63,14.83 42.632,14.831 42.633,14.833 42.635,14.834 42.636,14.835 42.638,14.836 42.639,14.837 42.641,14.838 42.642,14.839 42.644,14.84 42.645,14.841 42.647,14.842 42.648,14.843 42.65,14.844 42.651,14.845 42.653,14.846 42.655,14.847 42.656,14.848 42.658,14.849 42.659,14.85 42.661,14.851 42.663,14.852 42.664,14.853 42.666,14.854 42.668,14.855 42.669,14.856 42.671,14.857 42.673,14.858 42.674,14.859 42.676,14.86 42.678,14.861 42.68,14.862 42.681,14.863 42.683,14.864 42.685,14.865 42.687,14.866 42.688,14.867 42.69,14.868 42.692,14.869 42.694,14.87 42.696,14.871 42.698,14.872 42.699,14.873 42.701,14.874 42.703,14.875 42.705,14.876 42.707,14.877 42.709,14.878 42.711,14.879 42.713,14.88 42.714,14.881 42.716,14.882 42.718,14.882 42.72,14.883 42.722,14.884 42.724,14.885 42.726,14.886 42.728,14.887 42.73,14.888 42.732,14.889 42.734,14.89 42.736,14.891 42.738,14.891 42.74,14.892 42.742,14.893 42.744,14.894 42.747,14.895 42.749,14.896 42.751,14.897 42.753,14.898 42.755,14.898 42.757,14.899 42.759,14.9 42.761,14.901 42.764,14.902 42.766,14.903 42.768,14.904 42.77,14.905 ; 42.606,15.153 42.603,15.152 42.599,15.15 42.595,15.148 42.591,15.146 42.588,15.144 42.583,15.142 42.579,15.14 42.575,15.138 42.571,15.136 42.567,15.134 42.563,15.132 42.56,15.13 42.556,15.128 42.552,15.126 42.548,15.124 42.544,15.122 42.54,15.12 42.536,15.118 42.533,15.115 42.529,15.113 42.525,15.111 42.522,15.109 42.518,15.107 42.514,15.104 42.511,15.102 42.507,15.1 42.503,15.098 42.5,15.095 42.496,15.093 42.493,15.091 42.489,15.089 42.486,15.086 42.482,15.084 42.478,15.081 42.475,15.079 42.471,15.076 42.467,15.073 42.464,15.071 42.46,15.068 42.457,15.066 42.453,15.063 42.45,15.06 42.446,15.058 42.443,15.055 42.439,15.052 42.435,15.049 42.432,15.046 42.428,15.043 42.425,15.04 42.421,15.037 42.417,15.034 42.414,15.031 42.41,15.027 42.406,15.024 42.403,15.02 42.399,15.017 42.395,15.013 42.391,15.01 42.387,15.006 42.384,15.002 42.38,14.998 42.376,14.994 42.372,14.989 42.368,14.985 42.364,14.98 42.359,14.975 42.355,14.97 42.351,14.965 42.346,14.959 42.341,14.953 42.336,14.946 ccw(c42.735,14.654) 42.331,14.939 ccw(c42.731,14.657) 42.325,14.93 42.324,14.929 ccw(c42.77,14.631) 42.318,14.919 ccw(c42.766,14.634) 42.311,14.908 ccw(c42.761,14.637) 42.303,14.894 ccw(c42.754,14.64) 42.275,14.836 ccw(c42.756,14.64) 42.265,14.81 ccw(c42.762,14.638) 42.26,14.794 ccw(c42.767,14.636) 42.256,14.781 ccw(c42.772,14.635) 42.253,14.77 ccw(c42.777,14.633) 42.251,14.76 42.248,14.751 42.247,14.742 42.245,14.734 42.244,14.726 42.242,14.719 42.241,14.712 42.24,14.705 42.239,14.699 42.239,14.692 42.238,14.686 42.237,14.68 42.237,14.674 42.236,14.668 42.236,14.662 42.235,14.656 42.235,14.651 42.235,14.645 42.235,14.64 42.235,14.634 42.235,14.629 42.234,14.624 ccw(c42.913,14.619) 42.234,14.618 42.234,14.613 ccw(c42.839,14.619) 42.235,14.602 ccw(c42.833,14.619) 42.235,14.59 ccw(c42.827,14.619) 42.236,14.575 ccw(c42.821,14.618) 42.238,14.558 ccw(c42.811,14.617) 42.253,14.474 ccw(c42.814,14.618) 42.26,14.449 ccw(c42.82,14.62) 42.265,14.432 ccw(c42.826,14.622) 42.27,14.418 ccw(c42.831,14.624) 42.274,14.407 ccw(c42.837,14.626) 42.278,14.396 42.282,14.387 42.286,14.378 42.29,14.37 42.294,14.362 42.297,14.355 42.301,14.348 42.304,14.342 42.308,14.335 42.311,14.329 42.315,14.323 42.318,14.317 42.321,14.311 42.325,14.305 42.328,14.3 42.332,14.295 42.335,14.289 ccw(c42.844,14.619) 42.387,14.221 ccw(c42.846,14.622) 42.406,14.2 ccw(c42.851,14.626) 42.419,14.187 ccw(c42.855,14.631) 42.43,14.176 ccw(c42.86,14.635) 42.439,14.167 ccw(c42.864,14.64) 42.448,14.16 42.456,14.152 42.464,14.146 42.472,14.14 42.479,14.135 42.486,14.129 42.492,14.124 42.499,14.12 42.505,14.115 42.512,14.111 42.518,14.107 42.524,14.103 42.53,14.099 42.536,14.095 42.541,14.092 42.547,14.089 42.553,14.085 42.558,14.082 42.564,14.079 42.569,14.076 42.575,14.073 42.58,14.07 42.586,14.067 42.591,14.064 42.597,14.062 42.602,14.059 42.607,14.056 42.612,14.054 42.617,14.052 42.623,14.049 ccw(c42.986,14.845) 42.652,14.036 ccw(c42.99,14.853) 42.675,14.027 ccw(c42.993,14.861) 42.694,14.02 ccw(c42.996,14.87) 42.711,14.014 ccw(c42.999,14.879) 42.726,14.009 42.741,14.005 42.754,14.001 42.767,13.998 42.779,13.995 42.791,13.992 42.802,13.989 42.813,13.987 42.823,13.985 42.834,13.983 42.844,13.981 42.854,13.979 42.864,13.977 42.873,13.976 42.883,13.975 42.892,13.973 42.901,13.972 42.911,13.971 42.919,13.97 42.928,13.969 42.937,13.968 42.946,13.968 42.954,13.967 42.963,13.966 42.971,13.966 42.98,13.965 42.988,13.965 42.996,13.965 43.004,13.964 43.013,13.964 43.021,13.964 43.029,13.964 43.037,13.964 43.045,13.964 43.051,13.964 43.058,13.964 43.064,13.964 43.071,13.964 43.077,13.964 43.084,13.964 43.09,13.964 43.096,13.964 43.103,13.965 43.109,13.965 43.115,13.965 43.122,13.965 43.128,13.966 43.134,13.966 43.14,13.966 43.146,13.966 43.153,13.967 43.159,13.967 43.165,13.968 43.171,13.968 43.177,13.968 43.183,13.969 43.189,13.969 43.195,13.97 43.201,13.97 43.207,13.971 43.213,13.972 43.219,13.972 43.225,13.973 43.23,13.973 43.236,13.974 43.242,13.975 43.248,13.975 43.254,13.976 43.259,13.977 43.265,13.978 43.271,13.978 43.276,13.979 43.282,13.98 43.288,13.981 43.293,13.982 43.299,13.982 43.304,13.983 43.31,13.984 43.316,13.985 43.321,13.986 43.326,13.987 43.332,13.988 43.337,13.989 43.343,13.99 43.348,13.991 43.353,13.992 43.359,13.994 43.364,13.995 43.369,13.996 43.375,13.997 43.38,13.998 43.385,13.999 43.39,14.001 43.396,14.002 43.401,14.003 43.407,14.005 43.412,14.006 43.418,14.008 43.423,14.009 43.429,14.011 43.434,14.012 43.44,14.014 43.445,14.015 43.45,14.017 43.456,14.019 43.461,14.02 43.466,14.022 43.472,14.024 43.477,14.025 43.482,14.027 43.488,14.029 43.493,14.031 43.499,14.033 43.504,14.035 43.51,14.037 43.515,14.04 43.521,14.042 43.526,14.044 43.532,14.046 43.537,14.049 43.543,14.051 43.547,14.053 43.554,14.056 43.561,14.059 43.568,14.062 43.575,14.065 43.582,14.069 43.589,14.073 43.597,14.077 43.604,14.081 43.612,14.085 43.62,14.089 43.629,14.094 43.637,14.099 43.646,14.105 43.656,14.111 43.666,14.118 ccw(c43.271,14.707) 43.677,14.125 ccw(c43.275,14.701) 43.689,14.133 ccw(c43.279,14.695) 43.702,14.143 ccw(c43.283,14.689) 43.718,14.156 ccw(c43.291,14.68) 43.794,14.229 ccw(c43.287,14.683) 43.813,14.251 ccw(c43.282,14.688) 43.826,14.267 ccw(c43.276,14.692) 43.836,14.28 ccw(c43.271,14.696) 43.844,14.291 ccw(c43.265,14.7) 43.851,14.302 43.858,14.312 43.861,14.316 ccw(c43.236,14.72) 43.869,14.328 ccw(c43.242,14.716) 43.877,14.343 ccw(c43.248,14.712) 43.887,14.361 ccw(c43.261,14.706) 43.938,14.475 ccw(c43.255,14.708) 43.946,14.501 ccw(c43.247,14.71) 43.952,14.521 ccw(c43.24,14.712) 43.956,14.537 ccw(c43.233,14.714) 43.959,14.552 ccw(c43.226,14.715) 43.962,14.565 43.965,14.577 43.967,14.588 43.968,14.599 43.97,14.61 43.971,14.62 43.973,14.629 43.974,14.639 43.974,14.648 43.975,14.657 43.976,14.665 43.977,14.674 43.977,14.682 43.977,14.69 43.978,14.698 43.978,14.706 43.705,14.73